# Altium PCB PCB1.PcbDoc
Units mm, origin at the board's own origin, x right, y up, seen from the top; angles counter-clockwise.
Board outline 61 x 90 mm, 2 copper layers (Top Layer, Bottom Layer); 50 components, 51 nets, 171 pads, 11 vias.
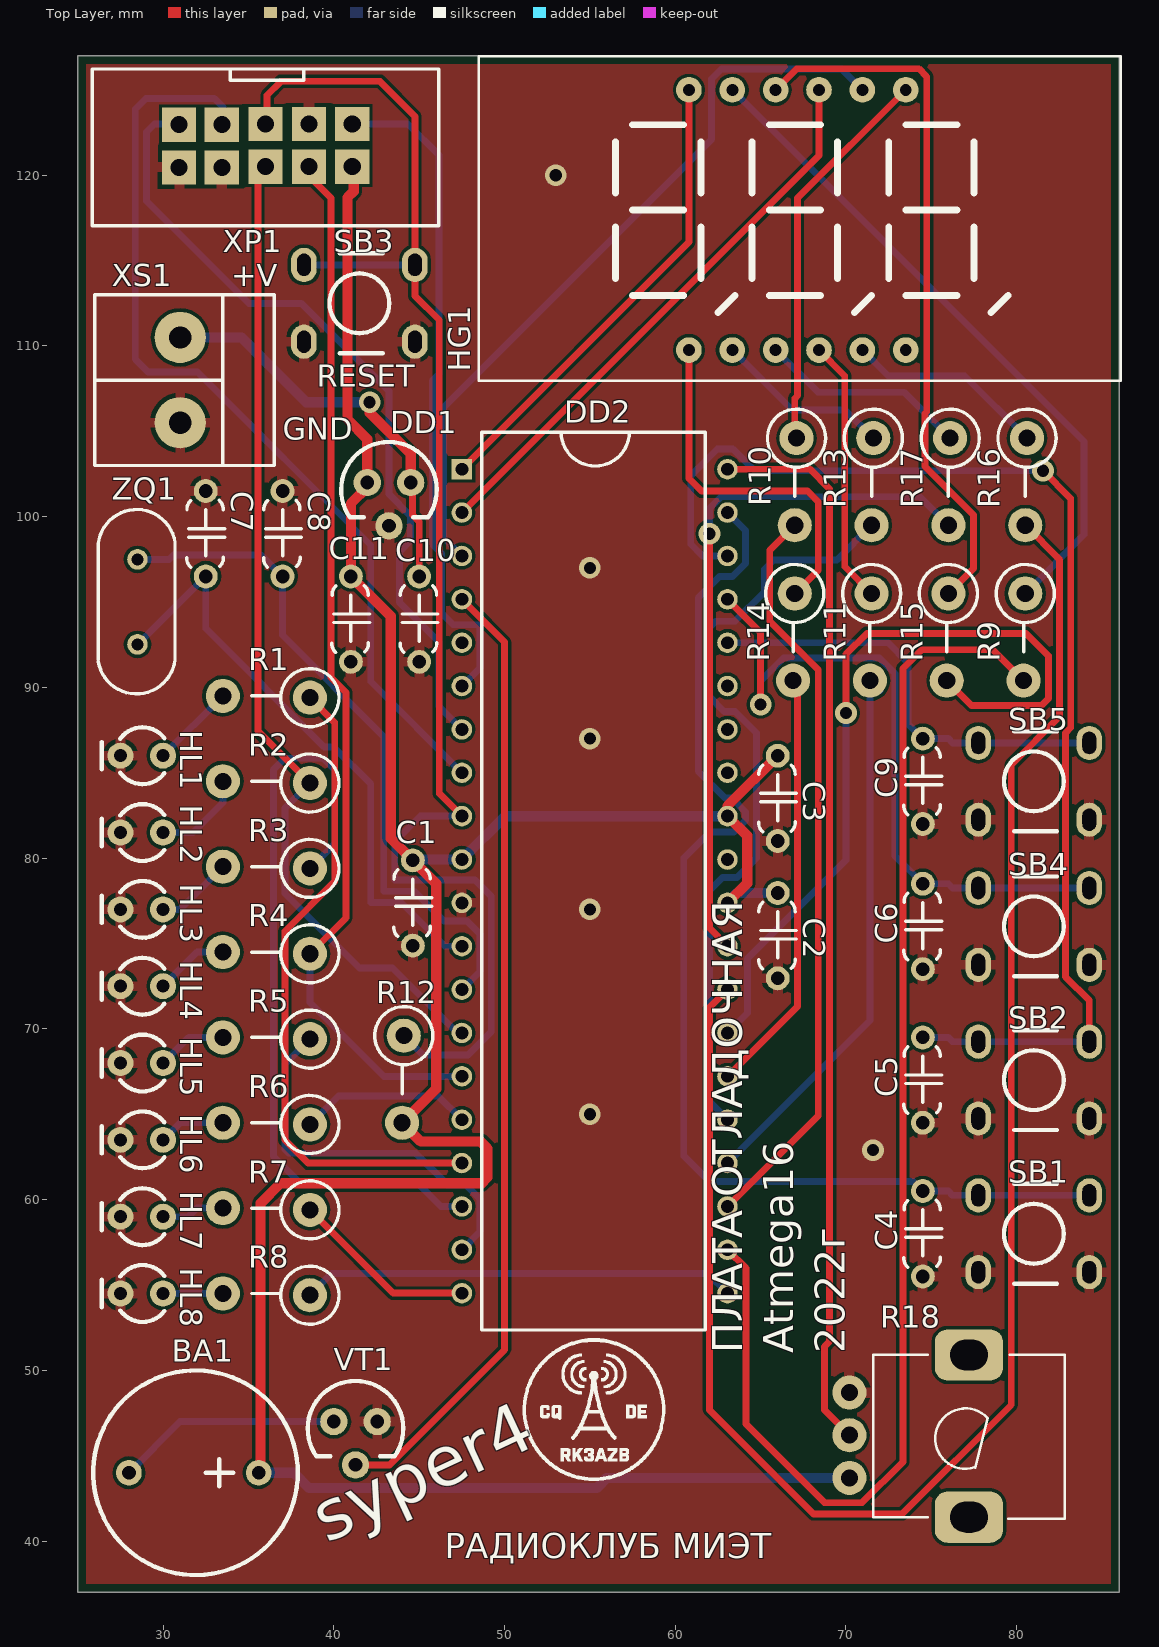
[diagram p0: Top Layer view]
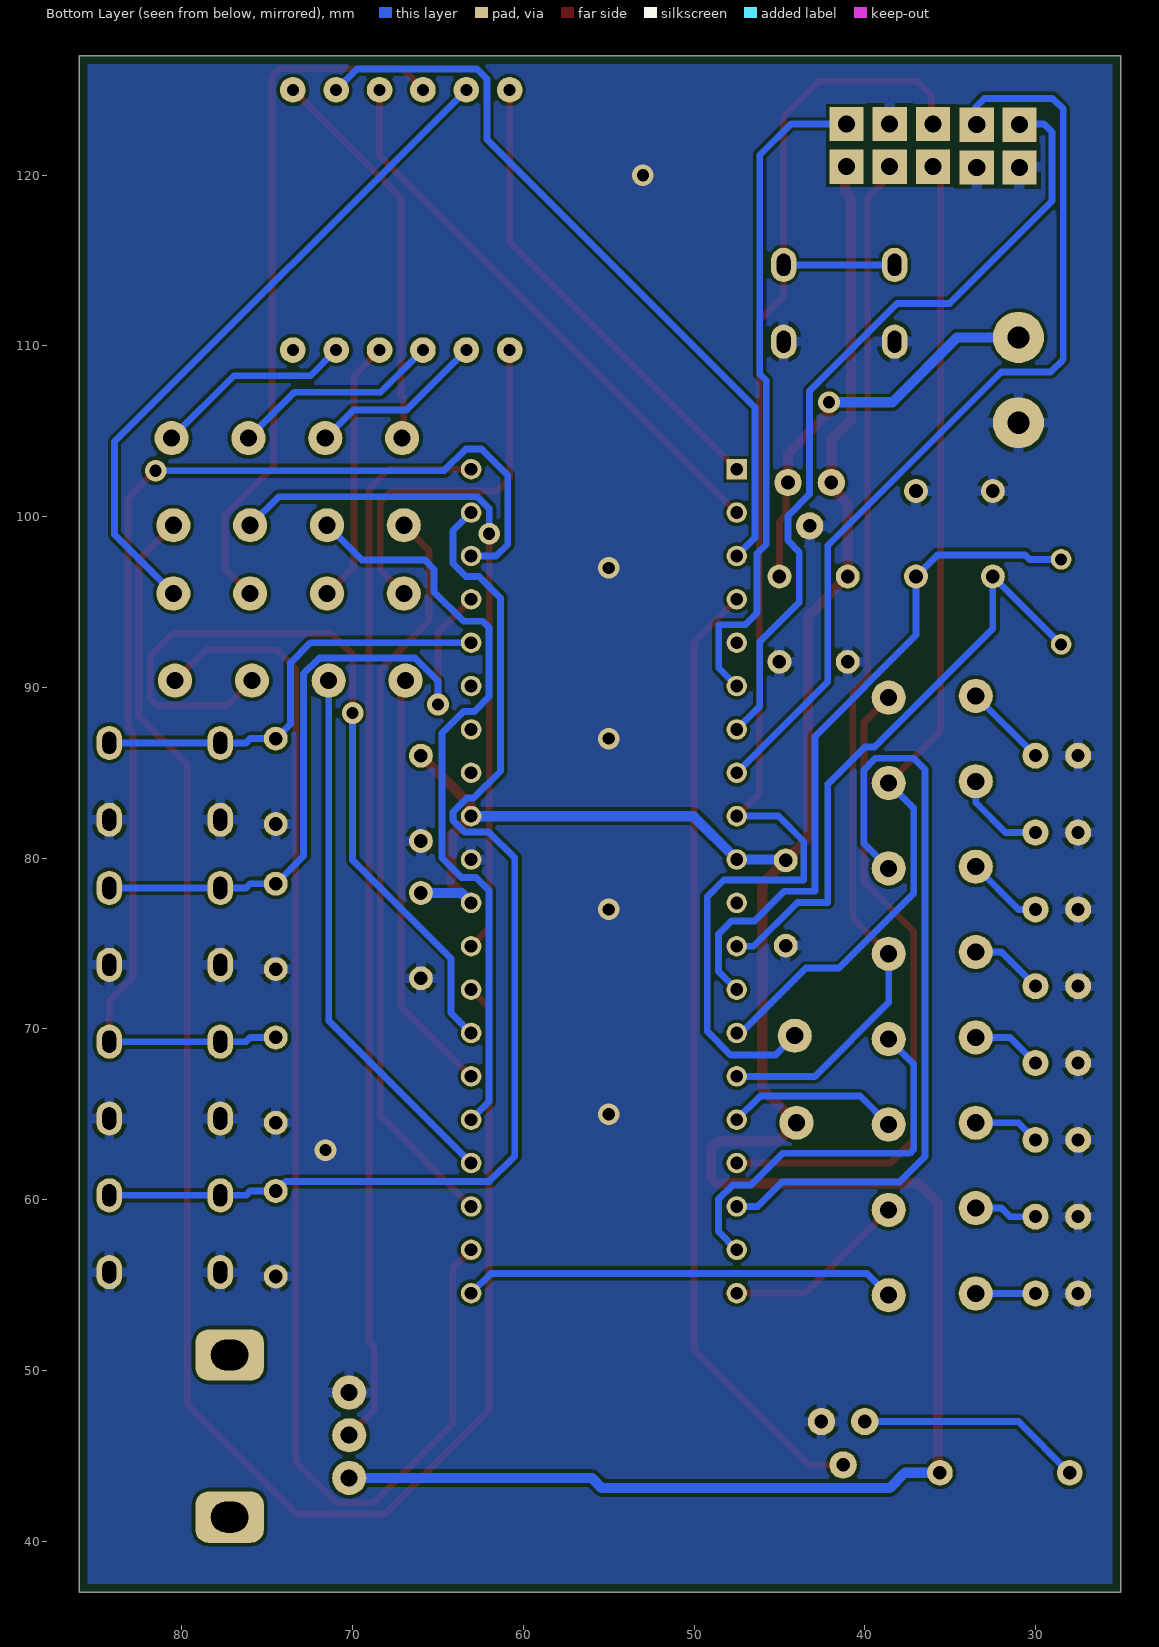
[diagram p1: Bottom Layer view, seen from below]
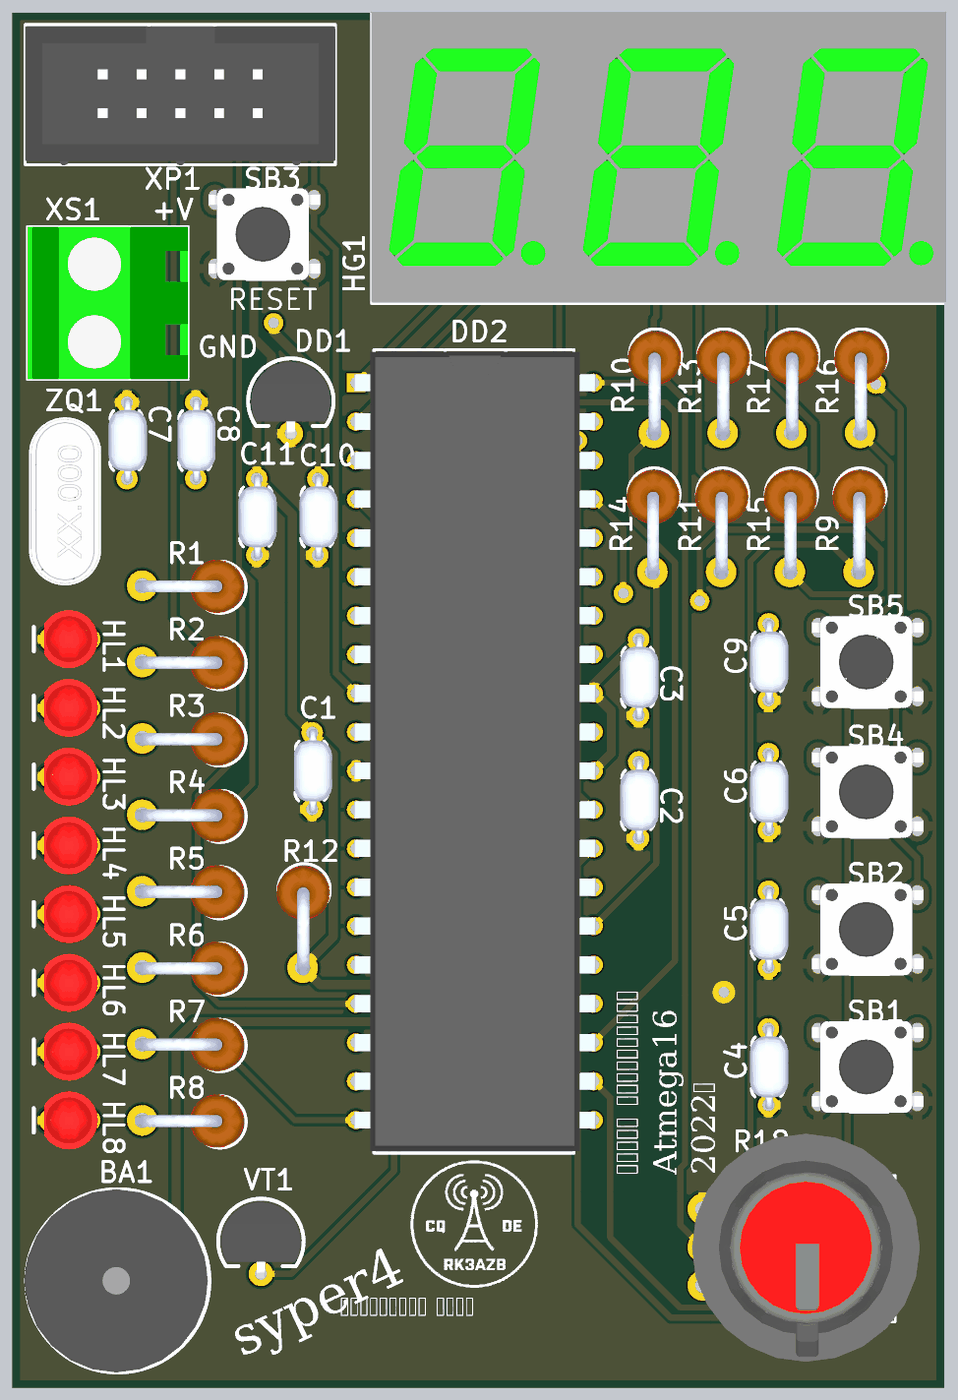
[diagram p2: 3D render of the assembled board from above, using the file's embedded part models]

## Layer stack, top to bottom
Top Solder: solder mask 0.0102, Solder Resist, Dk 3.5
Top Layer: signal copper 0.0356
Dielectric 1: dielectric 0.32, FR-4, Dk 4.8
Bottom Layer: signal copper 0.0356
Bottom Solder: solder mask 0.0102, Solder Resist, Dk 3.5

## Board outline
25,37 86,37 86,127 25,127

## Design rules (kind name [scope] priority, off if disabled: settings)
BoardOutlineClearance [All] p1: gap=0.4 ignorepadtopadclearanceinfootprint=FALSE
Clearance [All] p1: gap=0.2 ignorepadtopadclearanceinfootprint=FALSE except(0.125: Arc-Arc Arc-Track Arc-SMDPad Arc-THPad Arc-Via Arc-Text Track-Track Track-SMDPad Track-THPad Track-Via Track-Text SMDPad-Via SMDPad-Text THPad-THPad THPad-Via THPad-Text Via-Via Via-Text Fill-Text Poly-Text Region-Text Text-Text; 0.25: Arc-Hole Track-Hole SMDPad-Hole THPad-Hole Via-Hole Fill-Hole Poly-Hole Region-Hole Text-Hole)
ComponentClearance [All] p1: gap=0 collisioncheckmode=3 verticalgap=0.254 showdistances=FALSE
DiffPairsRouting [All] p1: maxlimit=0.254 minlimit=0.15 mostfreqgap=0.254 toplayer_minwidth=0.2 toplayer_maxwidth=0.381 toplayer_prefwidth=0.254 bottomlayer_minwidth=0.2 bottomlayer_maxwidth=0.381 bottomlayer_prefwidth=0.254 maxuncoupledlength=12.7
HoleSize [All] p1: absolutevalues=TRUE maxlimit=100 minlimit=0.3 maxpercent=80.000 minpercent=20.000
MinimumAnnularRing [All] p1: minimumring=0.15
MinimumSolderMaskSliver [All] p1: minsoldermaskwidth=0.15
PolygonConnect [All] p1: thpad.connectstyle=Relief thpad.reliefconductorwidth=0.6 thpad.reliefentries=4 thpad.polygonreliefangle="90 Angle" thpad.airgapwidth=0.254 smdpad.connectstyle=Relief smdpad.reliefconductorwidth=0.254 smdpad.reliefentries=4 smdpad.polygonreliefangle="90 Angle" smdpad.airgapwidth=0.254 via.connectstyle=Direct via.reliefconductorwidth=0.254 via.reliefentries=4 via.polygonreliefangle="90 Angle" via.airgapwidth=0.254
RoutingVias [All] p1: holewidth=0.4 width=0.8 viastyle="Through Hole" minholewidth=0.3 minwidth=0.8 maxholewidth=0.8 maxwidth=1.27
SilkToSilkClearance [All] p1 off: silktosilkclearance=0.15
SilkToSolderMaskClearance [IsPad] p1: minsilkscreentomaskgap=0.1 clearancetoexposedcopper=TRUE
SolderMaskExpansion [All] p1: expansion=0.102
Width [All] p1: maxlimit=1 minlimit=0.125 preferedwidth=0.254
24 further rules are at their usual default settings.

## Classes and differential pairs
net class Signal: NetBA1_2 NetC7_1 NetC8_1 NetDD2_16 NetDD2_17 NetDD2_18 NetDD2_19 NetDD2_20 NetDD2_21 NetDD2_22 NetDD2_23 NetDD2_24 NetDD2_25 NetDD2_26 NetDD2_27 NetDD2_28 NetDD2_29 NetDD2_40 NetHG1_1 NetHG1_2 NetHG1_3 NetHG1_4 NetHG1_5 NetHG1_7 NetHG1_10 NetHG1_11 NetHL1_1 NetHL2_1 NetHL3_1 NetHL4_1 NetHL5_1 NetHL6_1 NetHL7_1 NetHL8_1 PA1 PA2 PA3 PA4 PB0 PB1 PB2 PB3 PB7 PD0 PWR RST
net class GND: GND
net class POWER: PWR VCC

## Components (designator, comment, footprint, x,y, rotation, side; value= is the part's Value field where it differs from the comment)
BA1 "HPM14A" HPM14A 35.7,44 r180 top
C1 "0.1мк" К10-17Б 44.627,74.873 r90 top
C2 "0.1мк" К10-17Б 66,72.962 r90 top
C3 "0.1мк" К10-17Б 66,81 r90 top
C4 "0.1мк" К10-17Б 74.5,55.5 r90 top
C5 "0.1мк" К10-17Б 74.5,64.5 r90 top
C6 "0.1мк" К10-17Б 74.5,73.5 r90 top
C7 "22" К10-17Б 32.5,96.5 r90 top
C8 "22" К10-17Б 37,96.5 r90 top
C9 "0.1мк" К10-17Б 74.5,82 r90 top
C10 "0.1мк" К10-17Б 45,91.5 r90 top
C11 "0.1мк" К10-17Б 41,91.5 r90 top
DD1 "78L05" КТ-26 41.96,102 r0 top
DD2 "ATmega16L-16PU" DIP-40 55.279,78.65 r0 top
HG1 "KEM-5631AG" BC56 48.5,107.96 r0 top
HL1 "GNL-3012ED" GNL-3012ED 30,86 r180 top
HL2 "GNL-3012ED" GNL-3012ED 30,81.5 r180 top
HL3 "GNL-3012ED" GNL-3012ED 30,77 r180 top
HL4 "GNL-3012ED" GNL-3012ED 30,72.5 r180 top
HL5 "GNL-3012ED" GNL-3012ED 30,68 r180 top
HL6 "GNL-3012ED" GNL-3012ED 30,63.5 r180 top
HL7 "GNL-3012ED" GNL-3012ED 30,59 r180 top
HL8 "GNL-3012ED" GNL-3012ED 30,54.5 r180 top
R1 "1.3к" С2-23_2W_R 33.5,89.5 r0 top
R2 "1.3к" С2-23_2W_R 33.5,84.5 r0 top
R3 "1.3к" С2-23_2W_R 33.5,79.5 r0 top
R4 "1.3к" С2-23_2W_R 33.5,74.5 r0 top
R5 "1.3к" С2-23_2W_R 33.5,69.5 r0 top
R6 "1.3к" С2-23_2W_R 33.5,64.5 r0 top
R7 "1.3к" С2-23_2W_R 33.5,59.5 r0 top
R8 "1.3к" С2-23_2W_R 33.5,54.5 r0 top
R9 "270" С2-23_2W_R 80.4,90.4 r90 top
R10 "270" С2-23_2W_R 67,99.5 r90 top
R11 "270" С2-23_2W_R 71.4,90.4 r90 top
R12 "30к" С2-23_2W_R 44,64.5 r90 top
R13 "270" С2-23_2W_R 71.5,99.5 r90 top
R14 "270" С2-23_2W_R 66.9,90.4 r90 top
R15 "270" С2-23_2W_R 75.9,90.4 r90 top
R16 "270" С2-23_2W_R 80.5,99.5 r90 top
R17 "270" С2-23_2W_R 76,99.5 r90 top
R18 "RS09-N-30 10K" PTV09A-1 77,46 r270 top
SB1 "KLS7-TS6601" KLS7-TS6601 81,58 r0 top
SB2 "KLS7-TS6601" KLS7-TS6601 81,67 r0 top
SB3 "KLS7-TS6601" KLS7-TS6601 41.5,112.5 r0 top
SB4 "KLS7-TS6601" KLS7-TS6601 81,76 r0 top
SB5 "KLS7-TS6601" KLS7-TS6601 81,84.5 r0 top
VT1 "BC547" КТ-26 40,47 r0 top
XP1 "IDC-10" IDC-10 33.54,120.76 r0 top
XS1 "DG128-5.0-02P-14" DG128-5.0-02P-14 31,110.5 r270 top
ZQ1 "HC-49" HC-49 28.5,92.62 r90 top

## Footprints (in the part's own frame and the unit in brackets; to place one, negate y for a bottom-side part, rotate by r counter-clockwise, add the part's x,y. Pads: shape width x height; smd on the part's side, far side on the other; paste and mask are expansions set on the pad)
BC56 [mm]
  round 1.5 hole 0.7: 1(12.3,1.8) 2(14.84,1.8) 3(17.38,1.8) 4(19.92,1.8) 5(22.46,1.8) 6(25,1.8) 7(25,17.04) 8(22.46,17.04) 9(19.92,17.04) 10(17.38,17.04) 11(14.84,17.04) 12(12.3,17.04)
  silkscreen extent 0,0 37.6,19, body extent 0,0.1 37.6,19.1, height 11.1
DG128-5.0-02P-14 [mm]
  round 3 hole 1.3: 1(0,0) 2(5,0)
  silkscreen extent -2.5,-5 7.5,5.5, body extent -2.5,-5 7.5,5.5, height 14
DIP-40 [mm]
  rect 1.2x1.2 hole 0.75: 1(-7.779,24.13)
  round 1.2 hole 0.75: 2(-7.779,21.59) 3(-7.779,19.05) 4(-7.779,16.51) 5(-7.779,13.97) 6(-7.779,11.43) 7(-7.779,8.89) 8(-7.779,6.35) 9(-7.779,3.81) 10(-7.779,1.27) 11(-7.779,-1.27) 12(-7.779,-3.81) 13(-7.779,-6.35) 14(-7.779,-8.89) 15(-7.779,-11.43) 16(-7.779,-13.97) 17(-7.779,-16.51) 18(-7.779,-19.05) 19(-7.779,-21.59) 20(-7.779,-24.13) 21(7.779,-24.13) 22(7.779,-21.59) 23(7.779,-19.05) 24(7.779,-16.51) 25(7.779,-13.97) 26(7.779,-11.43) 27(7.779,-8.89) 28(7.779,-6.35) 29(7.779,-3.81) 30(7.779,-1.27) 31(7.779,1.27) 32(7.779,3.81) 33(7.779,6.35) 34(7.779,8.89) 35(7.779,11.43) 36(7.779,13.97) 37(7.779,16.51) 38(7.779,19.05) 39(7.779,21.59) 40(7.779,24.13)
  silkscreen extent -6.6,-26.29 6.48,26.29, body extent -7.92,-26.16 7.92,26.16, height 4.83
GNL-3012ED [mil]
  round 60 hole 30: 1(0,0) 2(98.42,0)
  silkscreen extent -3,-66 142,66, body extent -24,-75 114,75, height 366
HC-49 [mm]
  round 1.2 hole 0.7: 1(-0.1,0) 2(4.88,0)
  silkscreen extent -3,-2.2 7.8,2.3, body extent -3,-2.2 7.8,2.3, height 3.5
HPM14A [mm]
  round 1.5 hole 0.8: 1(0.1,0) 2(7.7,0)
  silkscreen extent -2.19,-5.99 9.79,5.99, body extent -2.1,-6 9.9,6, height 9.6
IDC-10 [mm]
  rect 2x2 hole 1: 1(7.54,2.24) 2(7.54,-0.26) 3(5,2.24) 4(5,-0.26) 5(2.46,2.24) 6(2.46,-0.26) 7(-0.1,2.2) 8(-0.1,-0.3) 9(-2.6,2.2) 10(-2.6,-0.3)
  silkscreen extent -7.7,-3.71 12.6,5.46, body extent -7.7,-3.76 12.6,5.34, height 2.7
KLS7-TS6601 [mm]
  oval 1.5x2 hole 0.8 slot 1.3 at 90 deg mask+0.102: 1(-3.25,2.25) 1(3.25,2.25) 2(-3.25,-2.25) 2(3.25,-2.25)
  silkscreen extent -1.75,-2.92 1.75,2.92, body extent -4.08,-3 3.89,3, height 5.4
PTV09A-1 [mm]
  round 2 hole 1: 1(-2.7,-6.8) 2(-0.2,-6.8) 3(2.3,-6.8)
  rrect50% 3x4 hole 2.2 slot 1.8 at 0 deg: CASE(-4.9,0.2) CASE(4.6,0.2)
  silkscreen extent -4.9,-5.4 4.7,5.8, body extent -7.63,-7.51 7.3,7.41, height 27.21
К10-17Б [mm]
  round 1.4 hole 0.8: 1(0,0) 2(5,0)
  silkscreen extent 0.55,-1.1 4.45,1.12, body extent -0.25,-1.3 5.25,1.2, height 6.54
КТ-26 [mm] "Аналог TO-92 // Масса не более 1г //  LIV"
  round 1.6 hole 0.8: 1(0,0) 2(1.27,-2.54) 3(2.54,0)
  silkscreen extent -1.53,-2.04 4.07,2.38, body extent -1.33,-2.81 3.87,2.16, height 7.7
С2-23_2W_R [mm]
  round 2 hole 1: 1(0,0) 2(5.1,-0.1)
  silkscreen extent 1.7,-1.8 6.8,1.6, body extent -0.5,-1.8 6.65,1.71, height 13.74

## Part data
C1 C2 C3 C4 C5 C6 C7 C8 C9 C10 C11: library part C_К10-17Б
DD1: "LDO преобразователь", Name=78L05
DD2: library part ATmega16L-8PU, "ATmega16-16PU, Микроконтроллер 8-Бит, AVR, 16МГц, 16КБ Flash [DIP-40]", Arrow Part Number=ATMEGA16L-8PU, Manufacturer_Name=Microchip, Mouser Part Number=556-ATMEGA16L-8PU, Arrow Price/Stock=https://www.arrow.com/en/products/atmega16l-8pu/microchip-technology, Datasheet Link=http://ww1.microchip.com/downloads/en/DeviceDoc/doc2466.pdf, Height=4.826mm, Manufacturer_Part_Number=ATmega16L-8PU, Mouser Price/Stock=https://www.mouser.co.uk/ProductDetail/Microchip-Technology-Atmel/ATMEGA16L-8PU?qs=aqrrBurbvGfzSW2h8UXBhA%3D%3D
HG1: library part BC56-12SRWA, "Индикатор красный ОК, 14.2мм 3х7, 10.5мКд"
R1 R2 R3 R4 R5 R6 R7 R8 R9 R10 R11 R12 R13 R14 R15 R16 R17: library part R_DIP
R18: library part PTV09A-4225F-B103, "10 кОм, Резистор переменный"
BA1: HelpURL=https://static.chipdip.ru/lib/243/DOC000243438.pdf
VT1: Name=BC547
XP1: System=Connector

## Via types
v1: diameter 1.27, hole 0.711, Top Layer to Bottom Layer, 11 vias

## Nets (pads, with @x,y where several pads share a name; then routed paths per layer and width w, separated by ;. In a path a pad name is that pad's centre, name@x,y a point inside that pad or via, vN(x,y) a via of type N, cw(c..) or ccw(c..) an arc to the next point about the centre after c; other vN are vias at no path point)
GND: C1.1 C2.1 C3.1 C4.1 C5.1 C6.1 C7.2 C8.2 C9.1 C10.1 C11.1 DD1.2 DD2.11 DD2.31 HL1.2 HL2.2 HL3.2 HL4.2 HL5.2 HL6.2 HL7.2 HL8.2 R18.1 SB1.2 SB2.2 SB3.2 SB4.2 SB5.2 VT1.3 XP1.3 XP1.8 XP1.10 XS1.2
  other v1: 71.582,62.899 55,65 55,77 55,87 55,97 53,120
MISO: DD2.7 XP1.9 | length 47.1
  Bottom Layer w0.4: XP1.9 30.9,123 29.5,123 29.032,122.532 29.032,118.491 35.027,112.497 38.1,112.497 43.231,107.366 43.231,101.321 44.501,100.051 44.501,98.603 43.84,97.942 43.84,94.973 46.154,92.659 46.154,88.886 DD2.7
MOSI: DD2.6 XP1.1 | length 39.6
  Bottom Layer w0.4: XP1.1 44.331,123 46.152,121.179 46.152,108.356 45.771,107.975 45.771,98.374 46.304,97.841 46.304,94.36 46.99,93.674 48.554,93.674 48.554,91.134 DD2.6
NetBA1_2: BA1.2 VT1.1 | length 13.2
  Bottom Layer w0.4: BA1.2 31,47 VT1.1@39.96,47
NetC7_1: C7.1 DD2.12 ZQ1.1 | length 35.5
  Bottom Layer w0.4: ZQ1.1@28.5,92.521 32.479,96.5 C7.1 32.5,93.444 39.436,86.508 39.992,86.508 42.165,84.335 42.165,77.411 43.95,77.411 46.521,74.84 DD2.12
NetC8_1: C8.1 DD2.13 ZQ1.2 | length 40.4
  Bottom Layer w0.4: ZQ1.2 30.353,97.5 30.618,97.765 35.735,97.765 C8.1 37,93.056 42.92,87.136 42.92,78.065 44.707,78.065 46.446,76.326 47.804,76.326 48.565,75.565 48.565,73.365 DD2.13
NetDD2_16: DD2.16 R6.2 | length 10.2
  Bottom Layer w0.4: R6.2 40.265,66.065 46.115,66.065 DD2.16
NetDD2_17: DD2.17 R1.2 | length 38.6
  Top Layer w0.4: R1.2 40.054,87.946 40.054,78.637 37.135,75.717 37.135,63.5 38.495,62.14 DD2.17
NetDD2_18: DD2.18 R3.2 | length 45.4
  Bottom Layer w0.4: R3.2 40.056,80.856 40.056,85.168 39.37,85.854 37.135,85.854 36.474,85.194 36.474,62.526 37.964,61.036 44.837,61.036 46.273,59.6 DD2.18
NetDD2_19: DD2.19 R5.2 | length 23.1
  Bottom Layer w0.4: R5.2 37.135,67.935 37.135,62.941 37.363,62.713 44.82,62.713 46.675,60.858 47.732,60.858 48.565,60.026 48.565,58.125 DD2.19
NetDD2_20: DD2.20 R7.2 | length 10.9
  Top Layer w0.4: R7.2 43.48,54.52 DD2.20
NetDD2_21: DD2.21 R8.2 | length 25.5
  Bottom Layer w0.4: R8.2 39.877,55.677 61.901,55.677 DD2.21
NetDD2_22: DD2.22 R9.1 | length 77.5
  Top Layer w0.4: DD2.22 64.135,55.983 64.135,46.857 68.746,42.246 70.948,42.246 73.33,44.628 73.33,91.11 74.422,92.202 78.598,92.202 R9.1
NetDD2_23: DD2.23 R10.1 | length 43.7
  Top Layer w0.4: DD2.23 68.377,64.919 68.377,91.034 65.532,93.878 65.532,98.032 R10.1@66.9,99.4
NetDD2_24: DD2.24 R11.1 | length 32.6
  Bottom Layer w0.4: DD2.24 71.4,70.482 R11.1 R11.1@72,89.8
NetDD2_25: DD2.25 R13.1 | length 45.2
  Bottom Layer w0.4: DD2.25 62.001,65.737 62.001,78.105 62.762,78.866 63.622,78.866 64.766,80.01 64.766,87.329 63.5,88.595 62.865,88.595 62.001,89.459 62.001,93.501 62.378,93.878 63.5,93.878 65.222,95.601 65.222,96.922 65.761,97.46 69.46,97.46 R13.1
NetDD2_26: DD2.26 R14.1 | length 25.1
  Top Layer w0.4: DD2.26 67.158,71.32 67.158,90.4 R14.1
NetDD2_27: DD2.27 R15.1 | length 47.2
  Top Layer w0.4: v1(70,88.5) 70,91.946 71.222,93.167 80.541,93.167 81.854,91.854 81.854,89.354 81.446,88.946 77.354,88.946 R15.1
  Bottom Layer w0.4: DD2.27 64.237,70.939 64.237,74.117 70,79.881 v1(70,88.5)
NetDD2_28: DD2.28 R16.1 | length 101.4
  Top Layer w0.4: DD2.28 62.001,71.243 62.001,47.683 68.092,41.592 73.291,41.592 79.68,47.981 79.68,85.464 82.508,88.292 82.508,97.492 R16.1
NetDD2_29: DD2.29 R17.1 | length 41.1
  Top Layer w0.4: v1(62,99) 62,75.898 DD2.29
  Bottom Layer w0.4: v1(62,99) 62,100.49 62.675,101.165 74.335,101.165 R17.1
NetDD2_40: DD2.40 R18.2 | length 62.6
  Top Layer w0.4: DD2.40 67.883,102.78 69.037,101.625 69.037,51.689 68.732,51.384 68.732,47.668 R18.2
NetHG1_1: HG1.1 R14.2 | length 21.6
  Top Layer w0.4: HG1.1 60.8,102.235 61.537,101.498 67.742,101.498 68.377,100.863 68.377,96.877 R14.2
NetHG1_2: HG1.2 R13.2 | length 10.4
  Bottom Layer w0.4: HG1.2 66.852,106.248 69.952,106.248 R13.2
NetHG1_3: HG1.3 R17.2 | length 12.4
  Bottom Layer w0.4: HG1.3 68.35,107.29 73.41,107.29 R17.2
NetHG1_4: HG1.4 R11.2 | length 15.5
  Top Layer w0.4: HG1.4 69.926,108.254 69.926,97.074 R11.2
NetHG1_5: HG1.5 R16.2 | length 11.8
  Bottom Layer w0.4: HG1.5 72.465,108.255 76.945,108.255 R16.2
NetHG1_7: HG1.7 R10.2 | length 23.2
  Top Layer w0.4: R10.2@67,104.5 67,106.934 67.158,107.092 67.158,118.658 HG1.7
NetHG1_10: HG1.10 R15.2 | length 41.7
  Top Layer w0.4: HG1.10 67.118,126.238 74.262,126.238 74.727,125.773 74.727,106.147 74.625,106.045 74.625,102.946 77.47,100.101 77.47,96.97 R15.2
NetHG1_11: HG1.11 R9.2 | length 39.5
  Bottom Layer w0.4: HG1.11 83.947,104.393 83.947,98.947 R9.2
NetHL1_1: HL1.1 R1.1 | length 4.9
  Bottom Layer w0.4: HL1.1 R1.1
NetHL2_1: HL2.1 R2.1 | length 5.5
  Bottom Layer w0.4: HL2.1 31.75,81.5 33.5,83.25 R2.1
NetHL3_1: HL3.1 R3.1 | length 4.5
  Bottom Layer w0.4: HL3.1 31,77 R3.1
NetHL4_1: HL4.1 R4.1 | length 4.3
  Bottom Layer w0.4: HL4.1 32,74.5 R4.1
NetHL5_1: HL5.1 R5.1 | length 4.1
  Bottom Layer w0.4: HL5.1 31.5,69.5 R5.1
NetHL6_1: HL6.1 R6.1 | length 3.9
  Bottom Layer w0.4: HL6.1 31,64.5 R6.1
NetHL7_1: HL7.1 R7.1 | length 3.7
  Bottom Layer w0.4: HL7.1 31.496,59 31.996,59.5 R7.1
NetHL8_1: HL8.1 R8.1 | length 3.5
  Bottom Layer w0.4: HL8.1 R8.1
PA1: C4.2 DD2.39 SB1.1 | length 68.1
  Bottom Layer w0.4: DD2.39 64.112,99.186 64.112,97.263 63.349,96.5 62.591,96.5 61.341,95.25 61.341,85.09 62.917,83.514 63.312,83.514 64.112,82.714 64.112,82.206 63.441,81.535 62.035,81.535 60.5,80 60.5,62.563 62.001,61.062 73.938,61.062 C4.2 75.997,60.5 76.247,60.25 77.75,60.25 SB1.1@84.25,60.25
PA2: C5.2 DD2.38 SB2.1 | length 72.9
  Top Layer w0.4: v1(81.534,102.692) 83.162,101.064 83.162,87.638 82.855,87.331 82.855,73.049 84.25,71.653 SB2.1@84.25,69.25
  Bottom Layer w0.4: DD2.38 61.595,97.7 60.909,98.386 60.909,102.409 62.459,103.959 63.37,103.959 64.636,102.692 v1(81.534,102.692) ; C5.2 75.997,69.5 76.247,69.25 77.75,69.25 SB2.1@84.25,69.25
PA3: C6.2 DD2.37 SB4.1 | length 40
  Top Layer w0.4: DD2.37 65,93.218 v1(65,89)
  Bottom Layer w0.4: v1(65,89) 65,90.374 66.351,91.725 71.949,91.725 72.873,90.801 72.873,80.127 C6.2 75.997,78.5 76.247,78.25 77.75,78.25 SB4.1@84.25,78.25
PA4: C9.2 DD2.36 SB5.1 | length 25.7
  Bottom Layer w0.4: DD2.36 72.455,92.62 73.635,91.44 73.635,87.865 C9.2 75.997,87 76.247,86.75 77.75,86.75 SB5.1@84.25,86.75
PB0: DD2.1 HG1.12 | length 27.7
  Top Layer w0.4: DD2.1 60.8,116.08 HG1.12
PB1: DD2.2 HG1.9 | length 33.4
  Top Layer w0.4: DD2.2 68.42,121.16 HG1.9
PB2: DD2.3 HG1.8 | length 44.4
  Bottom Layer w0.4: DD2.3 46.431,98.769 46.431,106.401 62.128,122.098 62.128,125.628 62.713,126.213 69.747,126.213 HG1.8
PB3: DD2.4 VT1.2 | length 56.6
  Top Layer w0.4: VT1.2@41.23,44.46 43.256,44.46 50,51.204 50,92.66 DD2.4
PB7: DD2.8 XP1.7 | length 55.2
  Bottom Layer w0.4: XP1.7 33.5,123.02 33.5,124 33,124.5 29,124.5 28.372,123.872 28.372,109.22 29.108,108.483 32.007,108.483 42.164,98.327 42.164,90.336 DD2.8
PD0: DD2.14 R2.2 XP1.6 | length 58.4
  Top Layer w0.4: XP1.6 35.56,120.06 35.56,87.44 R2.2
  Bottom Layer w0.4: R2.2 37.135,82.935 37.135,77.927 41.504,73.558 43.442,73.558 47.24,69.76 DD2.14
PD1: DD2.15 R4.2 XP1.4 | length 62.1
  Top Layer w0.4: XP1.4@38.1,121.04 38.1,120.4 39.827,118.673 39.827,90.576 40.708,89.696 40.708,76.508 R4.2
  Bottom Layer w0.4: R4.2 38.6,71.546 42.926,67.22 DD2.15
PWR: C10.2 DD1.3 XS1.1 | length 24.1
  Top Layer w0.4: DD1.3@44.615,101.885 44.615,100.09 45,99.705 C10.2
  Top Layer w0.6: v1(42.1,106.7) 42.1,106.091 44.5,103.691 DD1.3
  Top Layer w1: DD1.3 DD1.3@44.615,101.885
  Bottom Layer w0.6: XS1.1 34.58,110.5 38.38,106.7 v1(42.1,106.7)
RST: DD2.9 R12.2 SB3.1 XP1.5 | length 87.1
  Top Layer w0.4: XP1.5 36.09,123.09 36.09,124.684 36.906,125.5 42.699,125.5 44.755,123.444 44.755,114.75 44.75,114.75 44.75,112.933 46.177,111.506 46.177,83.783 DD2.9
  Bottom Layer w0.4: SB3.1@38.25,114.75 SB3.1@44.75,114.75 ; R12.2 45.222,68.478 47.854,68.478 49.225,69.85 49.225,77.754 48.26,78.719 43.574,78.719 43.574,80.971 45.063,82.46 DD2.9
VCC: BA1.1 C1.2 C2.2 C3.2 C11.2 DD1.1 DD2.10 DD2.30 DD2.32 R12.1 R18.3 XP1.2 | length 166.1
  Top Layer w0.6: BA1.1 35.71,44.11 35.71,59.79 36.875,60.954 48.66,60.954 49,61.294 49,63 48.602,63.398 45.102,63.398 R12.1 46,66.5 46,78.5 C1.2 43.328,81.172 43.328,94.172 C11.2 41,100.769 41.96,101.729 DD1.1 41.96,104.54 40.8,105.7 40.8,118.7 41.162,119.062 41.162,120.418 XP1.2 XP1.2@40.8,120.22 ; DD2.30 64.212,78.534 64.212,81.306 DD2.32 63.058,83.058 C3.2
  Bottom Layer w0.4: C1.2 C1.2@44.674,79.92
  Bottom Layer w0.6: BA1.1 37.651,44 38.547,43.104 55.397,43.104 55.994,43.7 R18.3 ; C1.2@44.674,79.92 DD2.10 50.04,82.46 DD2.32 ; DD2.30 63.64,77.962 C2.2
pads on no net: DD2.5 DD2.33 DD2.34 DD2.35 HG1.6 R18.CASE

## Polygon pours and split planes (outlines as drawn)
GND on Bottom Layer "Bottom Layer-GND" (solid, remove dead copper, pour order 8): 25.5,126.5 25.5,37.5 85.5,37.5 85.5,126.5
GND on Top Layer "Top Layer-GND" (solid, remove dead copper, pour order 10): 25.5,126.5 25.5,37.5 85.5,37.5 85.5,126.5

## Silkscreen, mask and mechanical layers (free items; w line width, h text height)
Top Overlay:
  drawing of 1758 lines, arcs and shapes, not listed
  text "+V" at 34,113.5 h1.3
  text "RESET" at 39,107.6 h1.3
  text "GND" at 37,104.5 h1.3
  text "ПЛАТА ОТЛАДОЧНАЯ / Atmega16 / 2022г" at 70.5,51 h3 r90
  text "syper4" at 40,39 h5 r25
  text "РАДИОКЛУБ МИЭТ" at 46.5,38.5 h2.5
Mechanical 2:
  the board outline again, w0.254